# EAGLE board 13867-Haptic_Motor_Driver_DRV2605L_v20-panel (EAGLE 7.5.0), part 1 of 4
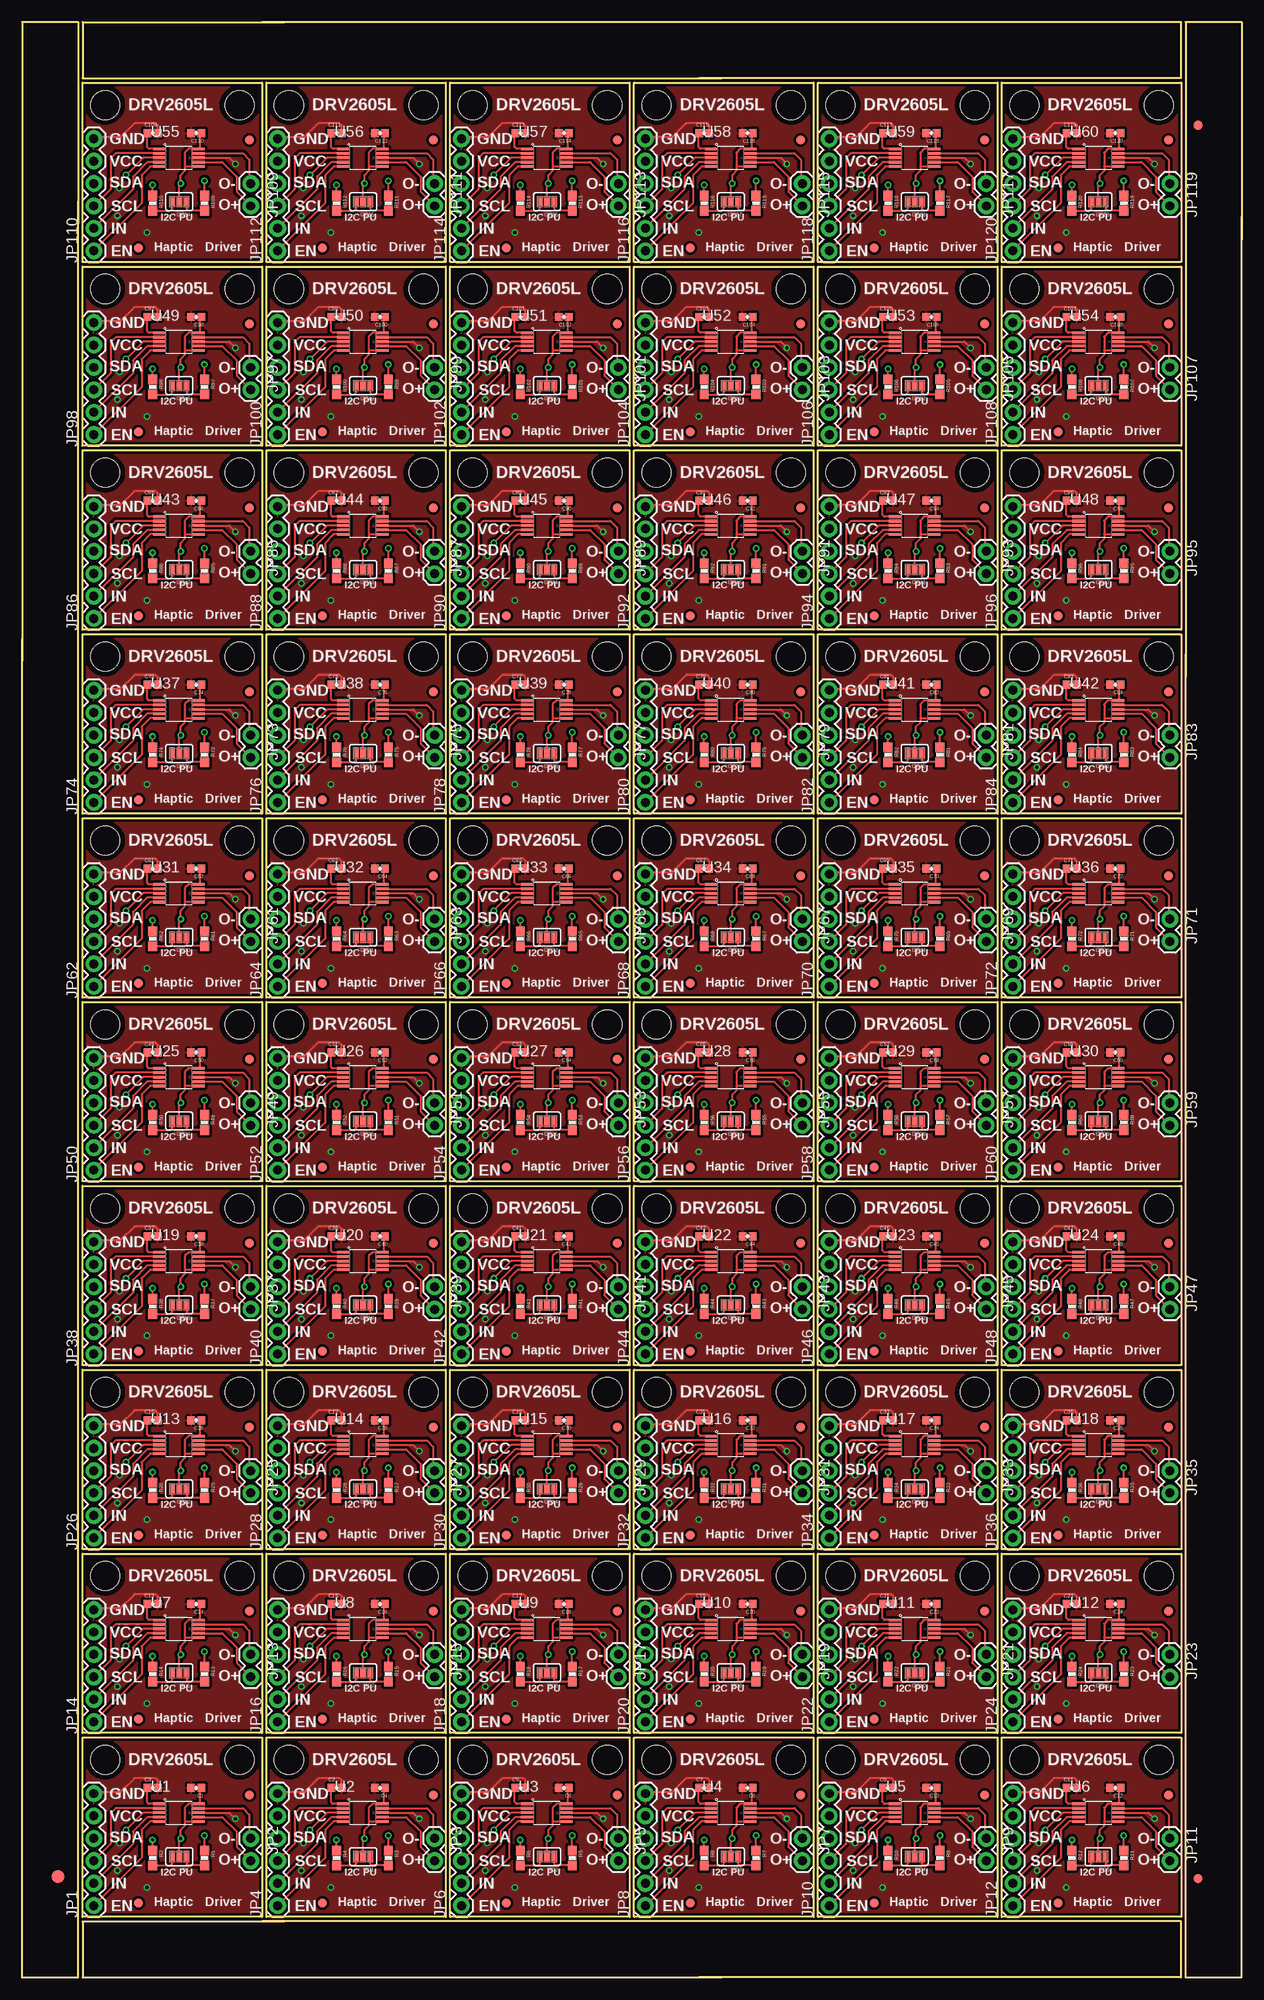
[diagram p0: board, top side]
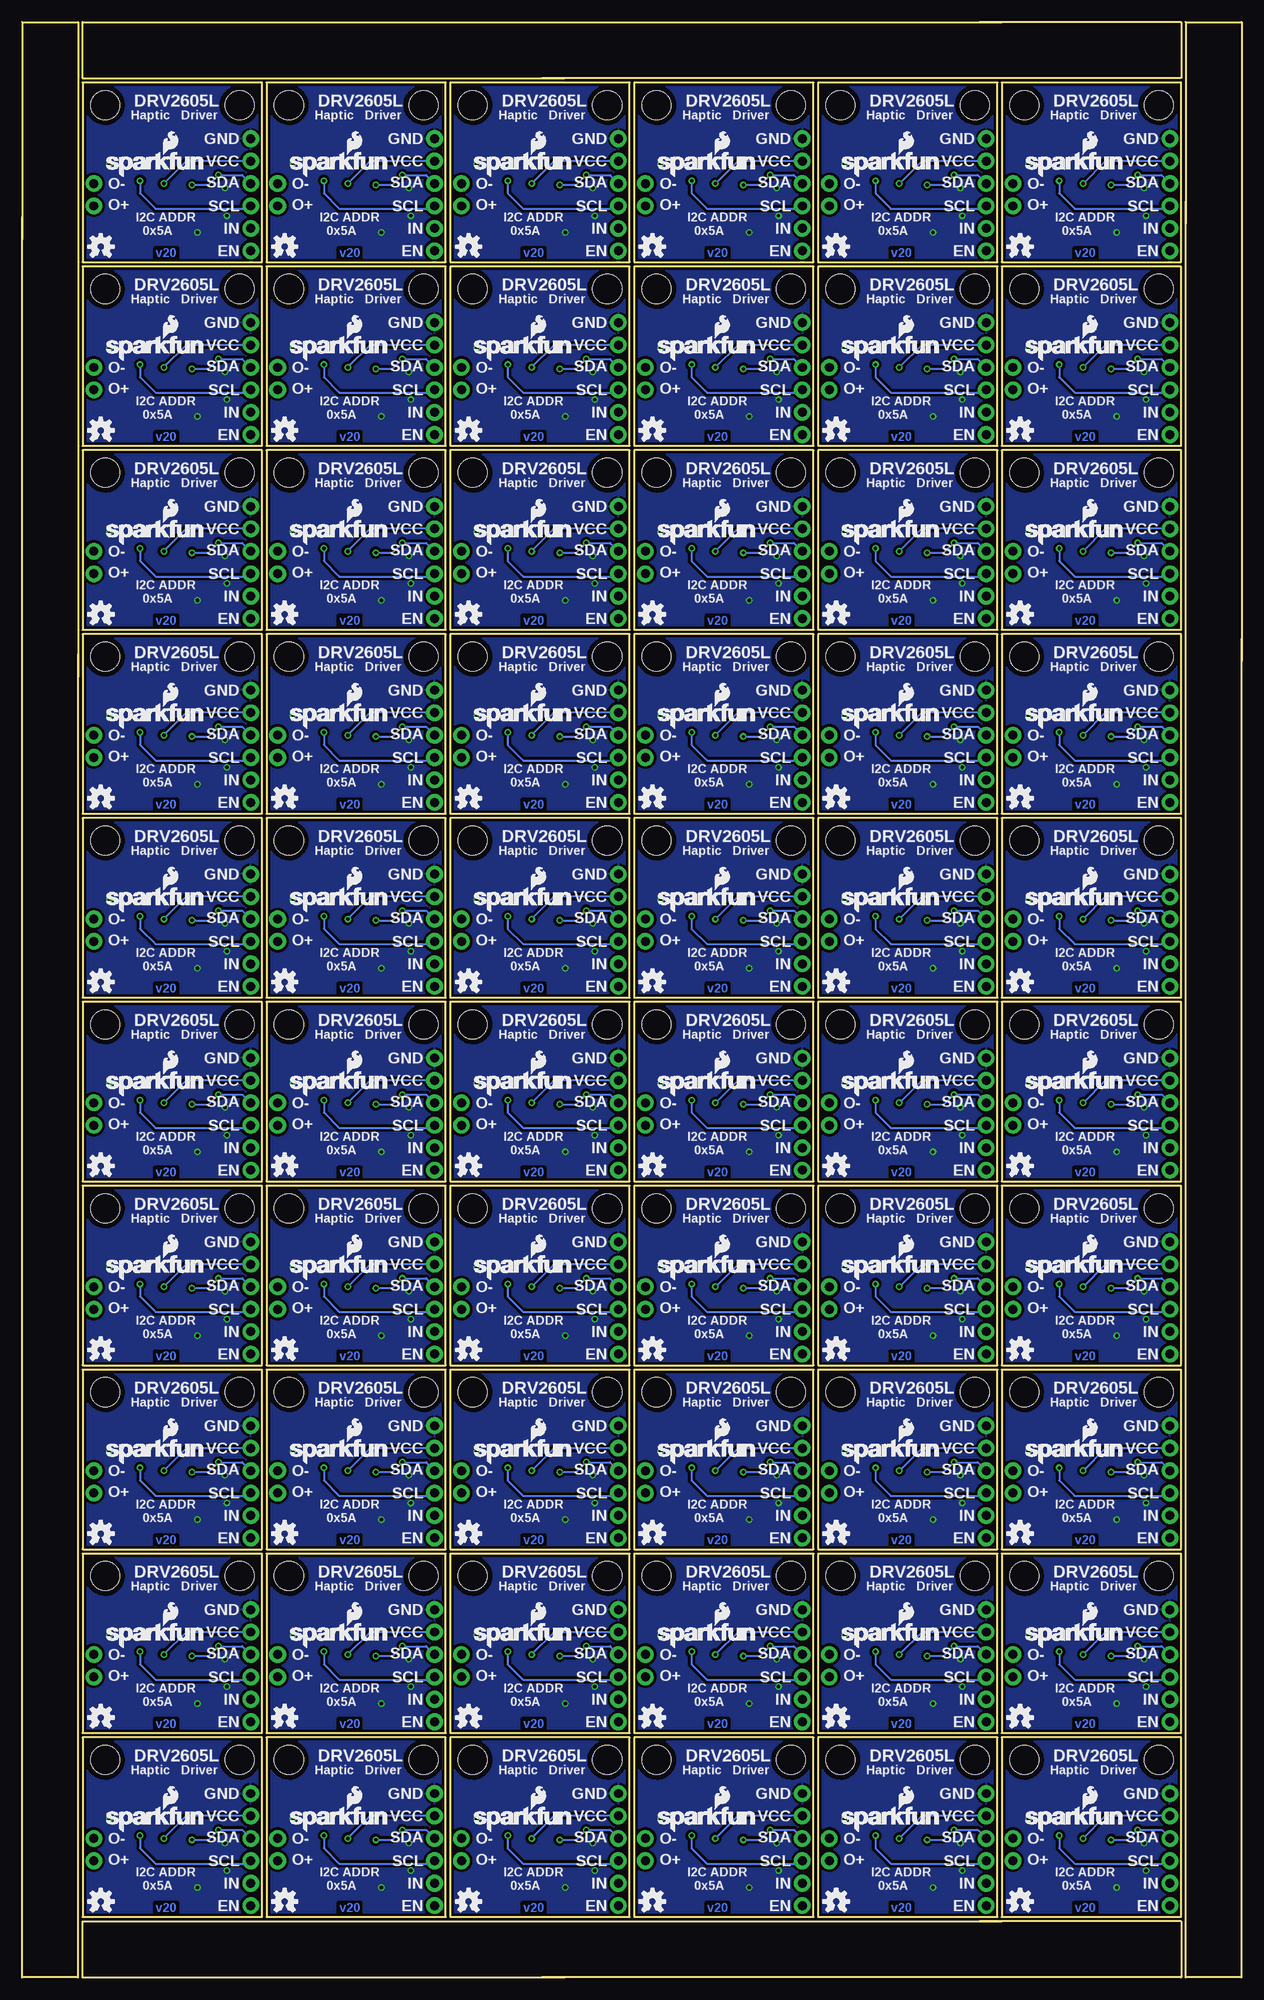
[diagram p1: board, bottom side, seen from below]

Size 138.18 x 221.49 mm. Coordinates in mm from the lower left corner, seen from the top.
Outline: 264 segments
Copper layers (1*16): Top 0.035mm / dielectric 1.5mm / Bottom 0.035mm
Design rules "SparkFun-2-layer-TIGHT": minimum track width 7mil, minimum drill 15mil, track to track 7mil, track to pad 7mil, pad to pad 7mil, via to via 7mil, smd to smd 7mil, copper to edge 7mil, drill to drill 7mil, minimum pad ring 7mil, minimum via ring 7mil, stop-mask expansion 4mil, vias tented up to drill 25mil, thermal gap 10mil
Net classes: 1 power: width 0.102 mm

## Footprints (pad centres in the part's own frame; a part is rotated, then mirrored left to right if it is on the bottom)
0402-CAP = smd 0.85 x 0.9: 1 -0.58,0; 2 0.58,0
FIDUCIAL-1.5X3 = smd 1.5 x 1.5: 1 0,0
FIDUCIAL-1X2 = smd 1 x 1: 1 0,0
PAD-JUMPER-3-NC_BY_PASTE_YES_SILK_FULL_BOX = smd 0.635 x 1.27: 1 -0.813,0; 2 0,0; 3 0.813,0
1X06 = drill 1.016 pad 1.88: 1 0,0; 2 2.54,0; 3 5.08,0; 4 7.62,0; 5 10.16,0; 6 12.7,0
1X02 = drill 1.016 pad 1.88: 1 0,0; 2 2.54,0
0603-RES = smd 1.1 x 1: 1 -0.85,0; 2 0.85,0
STAND-OFF = hole 3.302: 0,0
VSSOP-10 = smd 1.45 x 0.3: P$1 -1.905,1.06; P$2 -1.905,0.56; P$3 -1.905,0.06; P$4 -1.905,-0.44; P$5 -1.905,-0.94; P$6 2.495,-0.94; P$7 2.495,-0.44; P$8 2.495,0.06; P$9 2.495,0.56; P$10 2.495,1.06

## Placement (x,y rotation side)
C1  1.0uF  [0402-CAP]  19.72,21.46 180 top
C2  1.0uF  [0402-CAP]  35.62,21.46 0 top
C3  1.0uF  [0402-CAP]  14.8,21.46 0 top
C4  1.0uF  [0402-CAP]  40.54,21.46 180 top
C5  1.0uF  [0402-CAP]  56.45,21.46 0 top
C6  1.0uF  [0402-CAP]  61.37,21.46 180 top
C7  1.0uF  [0402-CAP]  77.28,21.46 0 top
C8  1.0uF  [0402-CAP]  82.2,21.46 180 top
C9  1.0uF  [0402-CAP]  98.11,21.46 0 top
C10  1.0uF  [0402-CAP]  103.03,21.46 180 top
C11  1.0uF  [0402-CAP]  118.94,21.46 0 top
C12  1.0uF  [0402-CAP]  123.86,21.46 180 top
C13  1.0uF  [0402-CAP]  14.8,42.29 0 top
C14  1.0uF  [0402-CAP]  19.72,42.29 180 top
C15  1.0uF  [0402-CAP]  35.62,42.29 0 top
C16  1.0uF  [0402-CAP]  40.54,42.29 180 top
C17  1.0uF  [0402-CAP]  56.45,42.29 0 top
C18  1.0uF  [0402-CAP]  61.37,42.29 180 top
C19  1.0uF  [0402-CAP]  77.28,42.29 0 top
C20  1.0uF  [0402-CAP]  82.2,42.29 180 top
C21  1.0uF  [0402-CAP]  98.11,42.29 0 top
C22  1.0uF  [0402-CAP]  103.03,42.29 180 top
C23  1.0uF  [0402-CAP]  118.94,42.29 0 top
C24  1.0uF  [0402-CAP]  123.86,42.29 180 top
C25  1.0uF  [0402-CAP]  14.8,63.12 0 top
C26  1.0uF  [0402-CAP]  19.72,63.12 180 top
C27  1.0uF  [0402-CAP]  35.62,63.12 0 top
C28  1.0uF  [0402-CAP]  40.54,63.12 180 top
C29  1.0uF  [0402-CAP]  56.45,63.12 0 top
C30  1.0uF  [0402-CAP]  61.37,63.12 180 top
C31  1.0uF  [0402-CAP]  77.28,63.12 0 top
C32  1.0uF  [0402-CAP]  82.2,63.12 180 top
C33  1.0uF  [0402-CAP]  98.11,63.12 0 top
C34  1.0uF  [0402-CAP]  103.03,63.12 180 top
C35  1.0uF  [0402-CAP]  118.94,63.12 0 top
C36  1.0uF  [0402-CAP]  123.86,63.12 180 top
C37  1.0uF  [0402-CAP]  14.8,83.95 0 top
C38  1.0uF  [0402-CAP]  19.72,83.95 180 top
C39  1.0uF  [0402-CAP]  35.62,83.95 0 top
C40  1.0uF  [0402-CAP]  40.54,83.95 180 top
C41  1.0uF  [0402-CAP]  56.45,83.95 0 top
C42  1.0uF  [0402-CAP]  61.37,83.95 180 top
C43  1.0uF  [0402-CAP]  77.28,83.95 0 top
C44  1.0uF  [0402-CAP]  82.2,83.95 180 top
C45  1.0uF  [0402-CAP]  98.11,83.95 0 top
C46  1.0uF  [0402-CAP]  103.03,83.95 180 top
C47  1.0uF  [0402-CAP]  118.94,83.95 0 top
C48  1.0uF  [0402-CAP]  123.86,83.95 180 top
C49  1.0uF  [0402-CAP]  14.8,104.78 0 top
C50  1.0uF  [0402-CAP]  19.72,104.78 180 top
C51  1.0uF  [0402-CAP]  35.62,104.78 0 top
C52  1.0uF  [0402-CAP]  40.54,104.78 180 top
C53  1.0uF  [0402-CAP]  56.45,104.78 0 top
C54  1.0uF  [0402-CAP]  61.37,104.78 180 top
C55  1.0uF  [0402-CAP]  77.28,104.78 0 top
C56  1.0uF  [0402-CAP]  82.2,104.78 180 top
C57  1.0uF  [0402-CAP]  98.11,104.78 0 top
C58  1.0uF  [0402-CAP]  103.03,104.78 180 top
C59  1.0uF  [0402-CAP]  118.94,104.78 0 top
C60  1.0uF  [0402-CAP]  123.86,104.78 180 top
C61  1.0uF  [0402-CAP]  14.8,125.6 0 top
C62  1.0uF  [0402-CAP]  19.72,125.6 180 top
C63  1.0uF  [0402-CAP]  35.62,125.6 0 top
C64  1.0uF  [0402-CAP]  40.54,125.6 180 top
C65  1.0uF  [0402-CAP]  56.45,125.6 0 top
C66  1.0uF  [0402-CAP]  61.37,125.6 180 top
C67  1.0uF  [0402-CAP]  77.28,125.6 0 top
C68  1.0uF  [0402-CAP]  82.2,125.6 180 top
C69  1.0uF  [0402-CAP]  98.11,125.6 0 top
C70  1.0uF  [0402-CAP]  103.03,125.6 180 top
C71  1.0uF  [0402-CAP]  118.94,125.6 0 top
C72  1.0uF  [0402-CAP]  123.86,125.6 180 top
C73  1.0uF  [0402-CAP]  14.8,146.43 0 top
C74  1.0uF  [0402-CAP]  19.72,146.43 180 top
C75  1.0uF  [0402-CAP]  35.62,146.43 0 top
C76  1.0uF  [0402-CAP]  40.54,146.43 180 top
C77  1.0uF  [0402-CAP]  56.45,146.43 0 top
C78  1.0uF  [0402-CAP]  61.37,146.43 180 top
C79  1.0uF  [0402-CAP]  77.28,146.43 0 top
C80  1.0uF  [0402-CAP]  82.2,146.43 180 top
C81  1.0uF  [0402-CAP]  98.11,146.43 0 top
C82  1.0uF  [0402-CAP]  103.03,146.43 180 top
C83  1.0uF  [0402-CAP]  118.94,146.43 0 top
C84  1.0uF  [0402-CAP]  123.86,146.43 180 top
C85  1.0uF  [0402-CAP]  14.8,167.26 0 top
C86  1.0uF  [0402-CAP]  19.72,167.26 180 top
C87  1.0uF  [0402-CAP]  35.62,167.26 0 top
C88  1.0uF  [0402-CAP]  40.54,167.26 180 top
C89  1.0uF  [0402-CAP]  56.45,167.26 0 top
C90  1.0uF  [0402-CAP]  61.37,167.26 180 top
C91  1.0uF  [0402-CAP]  77.28,167.26 0 top
C92  1.0uF  [0402-CAP]  82.2,167.26 180 top
C93  1.0uF  [0402-CAP]  98.11,167.26 0 top
C94  1.0uF  [0402-CAP]  103.03,167.26 180 top
C95  1.0uF  [0402-CAP]  118.94,167.26 0 top
C96  1.0uF  [0402-CAP]  123.86,167.26 180 top
C97  1.0uF  [0402-CAP]  14.8,188.09 0 top
C98  1.0uF  [0402-CAP]  19.72,188.09 180 top
C99  1.0uF  [0402-CAP]  35.62,188.09 0 top
C100  1.0uF  [0402-CAP]  40.54,188.09 180 top
C101  1.0uF  [0402-CAP]  56.45,188.09 0 top
C102  1.0uF  [0402-CAP]  61.37,188.09 180 top
C103  1.0uF  [0402-CAP]  77.28,188.09 0 top
C104  1.0uF  [0402-CAP]  82.2,188.09 180 top
C105  1.0uF  [0402-CAP]  98.11,188.09 0 top
C106  1.0uF  [0402-CAP]  103.03,188.09 180 top
C107  1.0uF  [0402-CAP]  118.94,188.09 0 top
C108  1.0uF  [0402-CAP]  123.86,188.09 180 top
C109  1.0uF  [0402-CAP]  14.8,208.91 0 top
C110  1.0uF  [0402-CAP]  19.72,208.91 180 top
C111  1.0uF  [0402-CAP]  35.62,208.91 0 top
C112  1.0uF  [0402-CAP]  40.54,208.91 180 top
C113  1.0uF  [0402-CAP]  56.45,208.91 0 top
C114  1.0uF  [0402-CAP]  61.37,208.91 180 top
C115  1.0uF  [0402-CAP]  77.28,208.91 0 top
C116  1.0uF  [0402-CAP]  82.2,208.91 180 top
C117  1.0uF  [0402-CAP]  98.11,208.91 0 top
C118  1.0uF  [0402-CAP]  103.03,208.91 180 top
C119  1.0uF  [0402-CAP]  118.94,208.91 0 top
C120  1.0uF  [0402-CAP]  123.86,208.91 180 top
E$1  [FIDUCIAL-1.5X3]  4.06,11.43 0 top
E$5  [FIDUCIAL-1X2]  133.22,209.8 180 top
E$6  [FIDUCIAL-1X2]  133.22,11.18 0 top
FID1  FIDUCIAL1X2  [FIDUCIAL-1X2]  13.21,8.45 0 top
FID2  FIDUCIAL1X2  [FIDUCIAL-1X2]  25.75,20.67 0 top
FID3  FIDUCIAL1X2  [FIDUCIAL-1X2]  34.04,8.45 0 top
FID4  FIDUCIAL1X2  [FIDUCIAL-1X2]  46.58,20.67 0 top
FID5  FIDUCIAL1X2  [FIDUCIAL-1X2]  54.86,8.45 0 top
FID6  FIDUCIAL1X2  [FIDUCIAL-1X2]  67.41,20.67 0 top
FID7  FIDUCIAL1X2  [FIDUCIAL-1X2]  75.69,8.45 0 top
FID8  FIDUCIAL1X2  [FIDUCIAL-1X2]  88.23,20.67 0 top
FID9  FIDUCIAL1X2  [FIDUCIAL-1X2]  96.52,8.45 0 top
FID10  FIDUCIAL1X2  [FIDUCIAL-1X2]  109.06,20.67 0 top
FID11  FIDUCIAL1X2  [FIDUCIAL-1X2]  117.35,8.45 0 top
FID12  FIDUCIAL1X2  [FIDUCIAL-1X2]  129.89,20.67 0 top
FID13  FIDUCIAL1X2  [FIDUCIAL-1X2]  13.21,29.27 0 top
FID14  FIDUCIAL1X2  [FIDUCIAL-1X2]  25.75,41.5 0 top
FID15  FIDUCIAL1X2  [FIDUCIAL-1X2]  34.04,29.27 0 top
FID16  FIDUCIAL1X2  [FIDUCIAL-1X2]  46.58,41.5 0 top
FID17  FIDUCIAL1X2  [FIDUCIAL-1X2]  54.86,29.27 0 top
FID18  FIDUCIAL1X2  [FIDUCIAL-1X2]  67.41,41.5 0 top
FID19  FIDUCIAL1X2  [FIDUCIAL-1X2]  75.69,29.27 0 top
FID20  FIDUCIAL1X2  [FIDUCIAL-1X2]  88.23,41.5 0 top
FID21  FIDUCIAL1X2  [FIDUCIAL-1X2]  96.52,29.27 0 top
FID22  FIDUCIAL1X2  [FIDUCIAL-1X2]  109.06,41.5 0 top
FID23  FIDUCIAL1X2  [FIDUCIAL-1X2]  117.35,29.27 0 top
FID24  FIDUCIAL1X2  [FIDUCIAL-1X2]  129.89,41.5 0 top
FID25  FIDUCIAL1X2  [FIDUCIAL-1X2]  13.21,50.1 0 top
FID26  FIDUCIAL1X2  [FIDUCIAL-1X2]  25.75,62.33 0 top
FID27  FIDUCIAL1X2  [FIDUCIAL-1X2]  34.04,50.1 0 top
FID28  FIDUCIAL1X2  [FIDUCIAL-1X2]  46.58,62.33 0 top
FID29  FIDUCIAL1X2  [FIDUCIAL-1X2]  54.86,50.1 0 top
FID30  FIDUCIAL1X2  [FIDUCIAL-1X2]  67.41,62.33 0 top
FID31  FIDUCIAL1X2  [FIDUCIAL-1X2]  75.69,50.1 0 top
FID32  FIDUCIAL1X2  [FIDUCIAL-1X2]  88.23,62.33 0 top
FID33  FIDUCIAL1X2  [FIDUCIAL-1X2]  96.52,50.1 0 top
FID34  FIDUCIAL1X2  [FIDUCIAL-1X2]  109.06,62.33 0 top
FID35  FIDUCIAL1X2  [FIDUCIAL-1X2]  117.35,50.1 0 top
FID36  FIDUCIAL1X2  [FIDUCIAL-1X2]  129.89,62.33 0 top
FID37  FIDUCIAL1X2  [FIDUCIAL-1X2]  13.21,70.93 0 top
FID38  FIDUCIAL1X2  [FIDUCIAL-1X2]  25.75,83.15 0 top
FID39  FIDUCIAL1X2  [FIDUCIAL-1X2]  34.04,70.93 0 top
FID40  FIDUCIAL1X2  [FIDUCIAL-1X2]  46.58,83.15 0 top
FID41  FIDUCIAL1X2  [FIDUCIAL-1X2]  54.86,70.93 0 top
FID42  FIDUCIAL1X2  [FIDUCIAL-1X2]  67.41,83.15 0 top
FID43  FIDUCIAL1X2  [FIDUCIAL-1X2]  75.69,70.93 0 top
FID44  FIDUCIAL1X2  [FIDUCIAL-1X2]  88.23,83.15 0 top
FID45  FIDUCIAL1X2  [FIDUCIAL-1X2]  96.52,70.93 0 top
FID46  FIDUCIAL1X2  [FIDUCIAL-1X2]  109.06,83.15 0 top
FID47  FIDUCIAL1X2  [FIDUCIAL-1X2]  117.35,70.93 0 top
FID48  FIDUCIAL1X2  [FIDUCIAL-1X2]  129.89,83.15 0 top
FID49  FIDUCIAL1X2  [FIDUCIAL-1X2]  13.21,91.76 0 top
FID50  FIDUCIAL1X2  [FIDUCIAL-1X2]  25.75,103.98 0 top
FID51  FIDUCIAL1X2  [FIDUCIAL-1X2]  34.04,91.76 0 top
FID52  FIDUCIAL1X2  [FIDUCIAL-1X2]  46.58,103.98 0 top
FID53  FIDUCIAL1X2  [FIDUCIAL-1X2]  54.86,91.76 0 top
FID54  FIDUCIAL1X2  [FIDUCIAL-1X2]  67.41,103.98 0 top
FID55  FIDUCIAL1X2  [FIDUCIAL-1X2]  75.69,91.76 0 top
FID56  FIDUCIAL1X2  [FIDUCIAL-1X2]  88.23,103.98 0 top
FID57  FIDUCIAL1X2  [FIDUCIAL-1X2]  96.52,91.76 0 top
FID58  FIDUCIAL1X2  [FIDUCIAL-1X2]  109.06,103.98 0 top
FID59  FIDUCIAL1X2  [FIDUCIAL-1X2]  117.35,91.76 0 top
FID60  FIDUCIAL1X2  [FIDUCIAL-1X2]  129.89,103.98 0 top
FID61  FIDUCIAL1X2  [FIDUCIAL-1X2]  13.21,112.59 0 top
FID62  FIDUCIAL1X2  [FIDUCIAL-1X2]  25.75,124.81 0 top
FID63  FIDUCIAL1X2  [FIDUCIAL-1X2]  34.04,112.59 0 top
FID64  FIDUCIAL1X2  [FIDUCIAL-1X2]  46.58,124.81 0 top
FID65  FIDUCIAL1X2  [FIDUCIAL-1X2]  54.86,112.59 0 top
FID66  FIDUCIAL1X2  [FIDUCIAL-1X2]  67.41,124.81 0 top
FID67  FIDUCIAL1X2  [FIDUCIAL-1X2]  75.69,112.59 0 top
FID68  FIDUCIAL1X2  [FIDUCIAL-1X2]  88.23,124.81 0 top
FID69  FIDUCIAL1X2  [FIDUCIAL-1X2]  96.52,112.59 0 top
FID70  FIDUCIAL1X2  [FIDUCIAL-1X2]  109.06,124.81 0 top
FID71  FIDUCIAL1X2  [FIDUCIAL-1X2]  117.35,112.59 0 top
FID72  FIDUCIAL1X2  [FIDUCIAL-1X2]  129.89,124.81 0 top
FID73  FIDUCIAL1X2  [FIDUCIAL-1X2]  13.21,133.41 0 top
FID74  FIDUCIAL1X2  [FIDUCIAL-1X2]  25.75,145.64 0 top
FID75  FIDUCIAL1X2  [FIDUCIAL-1X2]  34.04,133.41 0 top
FID76  FIDUCIAL1X2  [FIDUCIAL-1X2]  46.58,145.64 0 top
FID77  FIDUCIAL1X2  [FIDUCIAL-1X2]  54.86,133.41 0 top
FID78  FIDUCIAL1X2  [FIDUCIAL-1X2]  67.41,145.64 0 top
FID79  FIDUCIAL1X2  [FIDUCIAL-1X2]  75.69,133.41 0 top
FID80  FIDUCIAL1X2  [FIDUCIAL-1X2]  88.23,145.64 0 top
FID81  FIDUCIAL1X2  [FIDUCIAL-1X2]  96.52,133.41 0 top
FID82  FIDUCIAL1X2  [FIDUCIAL-1X2]  109.06,145.64 0 top
FID83  FIDUCIAL1X2  [FIDUCIAL-1X2]  117.35,133.41 0 top
FID84  FIDUCIAL1X2  [FIDUCIAL-1X2]  129.89,145.64 0 top
FID85  FIDUCIAL1X2  [FIDUCIAL-1X2]  13.21,154.24 0 top
FID86  FIDUCIAL1X2  [FIDUCIAL-1X2]  25.75,166.47 0 top
FID87  FIDUCIAL1X2  [FIDUCIAL-1X2]  34.04,154.24 0 top
FID88  FIDUCIAL1X2  [FIDUCIAL-1X2]  46.58,166.47 0 top
FID89  FIDUCIAL1X2  [FIDUCIAL-1X2]  54.86,154.24 0 top
FID90  FIDUCIAL1X2  [FIDUCIAL-1X2]  67.41,166.47 0 top
FID91  FIDUCIAL1X2  [FIDUCIAL-1X2]  75.69,154.24 0 top
FID92  FIDUCIAL1X2  [FIDUCIAL-1X2]  88.23,166.47 0 top
FID93  FIDUCIAL1X2  [FIDUCIAL-1X2]  96.52,154.24 0 top
FID94  FIDUCIAL1X2  [FIDUCIAL-1X2]  109.06,166.47 0 top
FID95  FIDUCIAL1X2  [FIDUCIAL-1X2]  117.35,154.24 0 top
FID96  FIDUCIAL1X2  [FIDUCIAL-1X2]  129.89,166.47 0 top
FID97  FIDUCIAL1X2  [FIDUCIAL-1X2]  13.21,175.07 0 top
FID98  FIDUCIAL1X2  [FIDUCIAL-1X2]  25.75,187.29 0 top
FID99  FIDUCIAL1X2  [FIDUCIAL-1X2]  34.04,175.07 0 top
FID100  FIDUCIAL1X2  [FIDUCIAL-1X2]  46.58,187.29 0 top
FID101  FIDUCIAL1X2  [FIDUCIAL-1X2]  54.86,175.07 0 top
FID102  FIDUCIAL1X2  [FIDUCIAL-1X2]  67.41,187.29 0 top
FID103  FIDUCIAL1X2  [FIDUCIAL-1X2]  75.69,175.07 0 top
FID104  FIDUCIAL1X2  [FIDUCIAL-1X2]  88.23,187.29 0 top
FID105  FIDUCIAL1X2  [FIDUCIAL-1X2]  96.52,175.07 0 top
FID106  FIDUCIAL1X2  [FIDUCIAL-1X2]  109.06,187.29 0 top
FID107  FIDUCIAL1X2  [FIDUCIAL-1X2]  117.35,175.07 0 top
FID108  FIDUCIAL1X2  [FIDUCIAL-1X2]  129.89,187.29 0 top
FID109  FIDUCIAL1X2  [FIDUCIAL-1X2]  13.21,195.9 0 top
FID110  FIDUCIAL1X2  [FIDUCIAL-1X2]  25.75,208.12 0 top
FID111  FIDUCIAL1X2  [FIDUCIAL-1X2]  34.04,195.9 0 top
FID112  FIDUCIAL1X2  [FIDUCIAL-1X2]  46.58,208.12 0 top
FID113  FIDUCIAL1X2  [FIDUCIAL-1X2]  54.86,195.9 0 top
FID114  FIDUCIAL1X2  [FIDUCIAL-1X2]  67.41,208.12 0 top
FID115  FIDUCIAL1X2  [FIDUCIAL-1X2]  75.69,195.9 0 top
FID116  FIDUCIAL1X2  [FIDUCIAL-1X2]  88.23,208.12 0 top
FID117  FIDUCIAL1X2  [FIDUCIAL-1X2]  96.52,195.9 0 top
FID118  FIDUCIAL1X2  [FIDUCIAL-1X2]  109.06,208.12 0 top
FID119  FIDUCIAL1X2  [FIDUCIAL-1X2]  117.35,195.9 0 top
FID120  FIDUCIAL1X2  [FIDUCIAL-1X2]  129.89,208.12 0 top
I2C  JUMPER-PAD-3-NC_BY_PASTE  [PAD-JUMPER-3-NC_BY_PASTE_YES_SILK_FULL_BOX]  17.81,13.68 180 top
I2C1  JUMPER-PAD-3-NC_BY_PASTE  [PAD-JUMPER-3-NC_BY_PASTE_YES_SILK_FULL_BOX]  38.64,13.68 180 top
I2C2  JUMPER-PAD-3-NC_BY_PASTE  [PAD-JUMPER-3-NC_BY_PASTE_YES_SILK_FULL_BOX]  59.47,13.68 180 top
I2C3  JUMPER-PAD-3-NC_BY_PASTE  [PAD-JUMPER-3-NC_BY_PASTE_YES_SILK_FULL_BOX]  80.3,13.68 180 top
I2C4  JUMPER-PAD-3-NC_BY_PASTE  [PAD-JUMPER-3-NC_BY_PASTE_YES_SILK_FULL_BOX]  101.12,13.68 180 top
I2C5  JUMPER-PAD-3-NC_BY_PASTE  [PAD-JUMPER-3-NC_BY_PASTE_YES_SILK_FULL_BOX]  121.95,13.68 180 top
I2C6  JUMPER-PAD-3-NC_BY_PASTE  [PAD-JUMPER-3-NC_BY_PASTE_YES_SILK_FULL_BOX]  17.81,34.51 180 top
I2C7  JUMPER-PAD-3-NC_BY_PASTE  [PAD-JUMPER-3-NC_BY_PASTE_YES_SILK_FULL_BOX]  38.64,34.51 180 top
I2C8  JUMPER-PAD-3-NC_BY_PASTE  [PAD-JUMPER-3-NC_BY_PASTE_YES_SILK_FULL_BOX]  59.47,34.51 180 top
I2C9  JUMPER-PAD-3-NC_BY_PASTE  [PAD-JUMPER-3-NC_BY_PASTE_YES_SILK_FULL_BOX]  80.3,34.51 180 top
I2C10  JUMPER-PAD-3-NC_BY_PASTE  [PAD-JUMPER-3-NC_BY_PASTE_YES_SILK_FULL_BOX]  101.12,34.51 180 top
I2C11  JUMPER-PAD-3-NC_BY_PASTE  [PAD-JUMPER-3-NC_BY_PASTE_YES_SILK_FULL_BOX]  121.95,34.51 180 top
I2C12  JUMPER-PAD-3-NC_BY_PASTE  [PAD-JUMPER-3-NC_BY_PASTE_YES_SILK_FULL_BOX]  17.81,55.34 180 top
I2C13  JUMPER-PAD-3-NC_BY_PASTE  [PAD-JUMPER-3-NC_BY_PASTE_YES_SILK_FULL_BOX]  38.64,55.34 180 top
I2C14  JUMPER-PAD-3-NC_BY_PASTE  [PAD-JUMPER-3-NC_BY_PASTE_YES_SILK_FULL_BOX]  59.47,55.34 180 top
I2C15  JUMPER-PAD-3-NC_BY_PASTE  [PAD-JUMPER-3-NC_BY_PASTE_YES_SILK_FULL_BOX]  80.3,55.34 180 top
I2C16  JUMPER-PAD-3-NC_BY_PASTE  [PAD-JUMPER-3-NC_BY_PASTE_YES_SILK_FULL_BOX]  101.12,55.34 180 top
I2C17  JUMPER-PAD-3-NC_BY_PASTE  [PAD-JUMPER-3-NC_BY_PASTE_YES_SILK_FULL_BOX]  121.95,55.34 180 top
I2C18  JUMPER-PAD-3-NC_BY_PASTE  [PAD-JUMPER-3-NC_BY_PASTE_YES_SILK_FULL_BOX]  17.81,76.17 180 top
I2C19  JUMPER-PAD-3-NC_BY_PASTE  [PAD-JUMPER-3-NC_BY_PASTE_YES_SILK_FULL_BOX]  38.64,76.17 180 top
I2C20  JUMPER-PAD-3-NC_BY_PASTE  [PAD-JUMPER-3-NC_BY_PASTE_YES_SILK_FULL_BOX]  59.47,76.17 180 top
I2C21  JUMPER-PAD-3-NC_BY_PASTE  [PAD-JUMPER-3-NC_BY_PASTE_YES_SILK_FULL_BOX]  80.3,76.17 180 top
I2C22  JUMPER-PAD-3-NC_BY_PASTE  [PAD-JUMPER-3-NC_BY_PASTE_YES_SILK_FULL_BOX]  101.12,76.17 180 top
I2C23  JUMPER-PAD-3-NC_BY_PASTE  [PAD-JUMPER-3-NC_BY_PASTE_YES_SILK_FULL_BOX]  121.95,76.17 180 top
I2C24  JUMPER-PAD-3-NC_BY_PASTE  [PAD-JUMPER-3-NC_BY_PASTE_YES_SILK_FULL_BOX]  17.81,97 180 top
I2C25  JUMPER-PAD-3-NC_BY_PASTE  [PAD-JUMPER-3-NC_BY_PASTE_YES_SILK_FULL_BOX]  38.64,97 180 top
I2C26  JUMPER-PAD-3-NC_BY_PASTE  [PAD-JUMPER-3-NC_BY_PASTE_YES_SILK_FULL_BOX]  59.47,97 180 top
I2C27  JUMPER-PAD-3-NC_BY_PASTE  [PAD-JUMPER-3-NC_BY_PASTE_YES_SILK_FULL_BOX]  80.3,97 180 top
I2C28  JUMPER-PAD-3-NC_BY_PASTE  [PAD-JUMPER-3-NC_BY_PASTE_YES_SILK_FULL_BOX]  101.12,97 180 top
I2C29  JUMPER-PAD-3-NC_BY_PASTE  [PAD-JUMPER-3-NC_BY_PASTE_YES_SILK_FULL_BOX]  121.95,97 180 top
I2C30  JUMPER-PAD-3-NC_BY_PASTE  [PAD-JUMPER-3-NC_BY_PASTE_YES_SILK_FULL_BOX]  17.81,117.82 180 top
I2C31  JUMPER-PAD-3-NC_BY_PASTE  [PAD-JUMPER-3-NC_BY_PASTE_YES_SILK_FULL_BOX]  38.64,117.82 180 top
I2C32  JUMPER-PAD-3-NC_BY_PASTE  [PAD-JUMPER-3-NC_BY_PASTE_YES_SILK_FULL_BOX]  59.47,117.82 180 top
I2C33  JUMPER-PAD-3-NC_BY_PASTE  [PAD-JUMPER-3-NC_BY_PASTE_YES_SILK_FULL_BOX]  80.3,117.82 180 top
I2C34  JUMPER-PAD-3-NC_BY_PASTE  [PAD-JUMPER-3-NC_BY_PASTE_YES_SILK_FULL_BOX]  101.12,117.82 180 top
I2C35  JUMPER-PAD-3-NC_BY_PASTE  [PAD-JUMPER-3-NC_BY_PASTE_YES_SILK_FULL_BOX]  121.95,117.82 180 top
I2C36  JUMPER-PAD-3-NC_BY_PASTE  [PAD-JUMPER-3-NC_BY_PASTE_YES_SILK_FULL_BOX]  17.81,138.65 180 top
I2C37  JUMPER-PAD-3-NC_BY_PASTE  [PAD-JUMPER-3-NC_BY_PASTE_YES_SILK_FULL_BOX]  38.64,138.65 180 top
I2C38  JUMPER-PAD-3-NC_BY_PASTE  [PAD-JUMPER-3-NC_BY_PASTE_YES_SILK_FULL_BOX]  59.47,138.65 180 top
I2C39  JUMPER-PAD-3-NC_BY_PASTE  [PAD-JUMPER-3-NC_BY_PASTE_YES_SILK_FULL_BOX]  80.3,138.65 180 top
I2C40  JUMPER-PAD-3-NC_BY_PASTE  [PAD-JUMPER-3-NC_BY_PASTE_YES_SILK_FULL_BOX]  101.12,138.65 180 top
I2C41  JUMPER-PAD-3-NC_BY_PASTE  [PAD-JUMPER-3-NC_BY_PASTE_YES_SILK_FULL_BOX]  121.95,138.65 180 top
I2C42  JUMPER-PAD-3-NC_BY_PASTE  [PAD-JUMPER-3-NC_BY_PASTE_YES_SILK_FULL_BOX]  17.81,159.48 180 top
I2C43  JUMPER-PAD-3-NC_BY_PASTE  [PAD-JUMPER-3-NC_BY_PASTE_YES_SILK_FULL_BOX]  38.64,159.48 180 top
I2C44  JUMPER-PAD-3-NC_BY_PASTE  [PAD-JUMPER-3-NC_BY_PASTE_YES_SILK_FULL_BOX]  59.47,159.48 180 top
I2C45  JUMPER-PAD-3-NC_BY_PASTE  [PAD-JUMPER-3-NC_BY_PASTE_YES_SILK_FULL_BOX]  80.3,159.48 180 top
I2C46  JUMPER-PAD-3-NC_BY_PASTE  [PAD-JUMPER-3-NC_BY_PASTE_YES_SILK_FULL_BOX]  101.12,159.48 180 top
I2C47  JUMPER-PAD-3-NC_BY_PASTE  [PAD-JUMPER-3-NC_BY_PASTE_YES_SILK_FULL_BOX]  121.95,159.48 180 top
I2C48  JUMPER-PAD-3-NC_BY_PASTE  [PAD-JUMPER-3-NC_BY_PASTE_YES_SILK_FULL_BOX]  17.81,180.31 180 top
I2C49  JUMPER-PAD-3-NC_BY_PASTE  [PAD-JUMPER-3-NC_BY_PASTE_YES_SILK_FULL_BOX]  38.64,180.31 180 top
I2C50  JUMPER-PAD-3-NC_BY_PASTE  [PAD-JUMPER-3-NC_BY_PASTE_YES_SILK_FULL_BOX]  59.47,180.31 180 top
I2C51  JUMPER-PAD-3-NC_BY_PASTE  [PAD-JUMPER-3-NC_BY_PASTE_YES_SILK_FULL_BOX]  80.3,180.31 180 top
I2C52  JUMPER-PAD-3-NC_BY_PASTE  [PAD-JUMPER-3-NC_BY_PASTE_YES_SILK_FULL_BOX]  101.12,180.31 180 top
I2C53  JUMPER-PAD-3-NC_BY_PASTE  [PAD-JUMPER-3-NC_BY_PASTE_YES_SILK_FULL_BOX]  121.95,180.31 180 top
I2C54  JUMPER-PAD-3-NC_BY_PASTE  [PAD-JUMPER-3-NC_BY_PASTE_YES_SILK_FULL_BOX]  17.81,201.14 180 top
I2C55  JUMPER-PAD-3-NC_BY_PASTE  [PAD-JUMPER-3-NC_BY_PASTE_YES_SILK_FULL_BOX]  38.64,201.14 180 top
I2C56  JUMPER-PAD-3-NC_BY_PASTE  [PAD-JUMPER-3-NC_BY_PASTE_YES_SILK_FULL_BOX]  59.47,201.14 180 top
I2C57  JUMPER-PAD-3-NC_BY_PASTE  [PAD-JUMPER-3-NC_BY_PASTE_YES_SILK_FULL_BOX]  80.3,201.14 180 top
I2C58  JUMPER-PAD-3-NC_BY_PASTE  [PAD-JUMPER-3-NC_BY_PASTE_YES_SILK_FULL_BOX]  101.12,201.14 180 top
I2C59  JUMPER-PAD-3-NC_BY_PASTE  [PAD-JUMPER-3-NC_BY_PASTE_YES_SILK_FULL_BOX]  121.95,201.14 180 top
JP1  [1X06]  8.13,8.13 90 top
JP2  [1X02]  25.91,15.75 270 top
JP3  [1X02]  46.74,15.75 270 top
JP4  [1X06]  28.96,8.13 90 top
JP5  [1X02]  67.56,15.75 270 top
JP6  [1X06]  49.78,8.13 90 top
JP7  [1X02]  88.39,15.75 270 top
JP8  [1X06]  70.61,8.13 90 top
JP9  [1X02]  109.22,15.75 270 top
JP10  [1X06]  91.44,8.13 90 top
JP11  [1X02]  130.05,15.75 270 top
JP12  [1X06]  112.27,8.13 90 top
JP13  [1X02]  25.91,36.58 270 top
JP14  [1X06]  8.13,28.96 90 top
JP15  [1X02]  46.74,36.58 270 top
JP16  [1X06]  28.96,28.96 90 top
JP17  [1X02]  67.56,36.58 270 top
JP18  [1X06]  49.78,28.96 90 top
JP19  [1X02]  88.39,36.58 270 top
JP20  [1X06]  70.61,28.96 90 top
JP21  [1X02]  109.22,36.58 270 top
JP22  [1X06]  91.44,28.96 90 top
JP23  [1X02]  130.05,36.58 270 top
JP24  [1X06]  112.27,28.96 90 top
JP25  [1X02]  25.91,57.4 270 top
JP26  [1X06]  8.13,49.78 90 top
JP27  [1X02]  46.74,57.4 270 top
JP28  [1X06]  28.96,49.78 90 top
JP29  [1X02]  67.56,57.4 270 top
JP30  [1X06]  49.78,49.78 90 top
JP31  [1X02]  88.39,57.4 270 top
JP32  [1X06]  70.61,49.78 90 top
JP33  [1X02]  109.22,57.4 270 top
JP34  [1X06]  91.44,49.78 90 top
JP35  [1X02]  130.05,57.4 270 top
JP36  [1X06]  112.27,49.78 90 top
JP37  [1X02]  25.91,78.23 270 top
JP38  [1X06]  8.13,70.61 90 top
JP39  [1X02]  46.74,78.23 270 top
JP40  [1X06]  28.96,70.61 90 top
JP41  [1X02]  67.56,78.23 270 top
JP42  [1X06]  49.78,70.61 90 top
JP43  [1X02]  88.39,78.23 270 top
JP44  [1X06]  70.61,70.61 90 top
JP45  [1X02]  109.22,78.23 270 top
JP46  [1X06]  91.44,70.61 90 top
JP47  [1X02]  130.05,78.23 270 top
JP48  [1X06]  112.27,70.61 90 top
JP49  [1X02]  25.91,99.06 270 top
JP50  [1X06]  8.13,91.44 90 top
JP51  [1X02]  46.74,99.06 270 top
JP52  [1X06]  28.96,91.44 90 top
JP53  [1X02]  67.56,99.06 270 top
JP54  [1X06]  49.78,91.44 90 top
JP55  [1X02]  88.39,99.06 270 top
JP56  [1X06]  70.61,91.44 90 top
JP57  [1X02]  109.22,99.06 270 top
JP58  [1X06]  91.44,91.44 90 top
JP59  [1X02]  130.05,99.06 270 top
JP60  [1X06]  112.27,91.44 90 top
JP61  [1X02]  25.91,119.89 270 top
JP62  [1X06]  8.13,112.27 90 top
JP63  [1X02]  46.74,119.89 270 top
JP64  [1X06]  28.96,112.27 90 top
JP65  [1X02]  67.56,119.89 270 top
JP66  [1X06]  49.78,112.27 90 top
JP67  [1X02]  88.39,119.89 270 top
JP68  [1X06]  70.61,112.27 90 top
JP69  [1X02]  109.22,119.89 270 top
JP70  [1X06]  91.44,112.27 90 top
JP71  [1X02]  130.05,119.89 270 top
JP72  [1X06]  112.27,112.27 90 top
JP73  [1X02]  25.91,140.72 270 top
JP74  [1X06]  8.13,133.1 90 top
JP75  [1X02]  46.74,140.72 270 top
JP76  [1X06]  28.96,133.1 90 top
JP77  [1X02]  67.56,140.72 270 top
JP78  [1X06]  49.78,133.1 90 top
JP79  [1X02]  88.39,140.72 270 top
JP80  [1X06]  70.61,133.1 90 top
JP81  [1X02]  109.22,140.72 270 top
JP82  [1X06]  91.44,133.1 90 top
JP83  [1X02]  130.05,140.72 270 top
JP84  [1X06]  112.27,133.1 90 top
JP85  [1X02]  25.91,161.54 270 top
JP86  [1X06]  8.13,153.92 90 top
JP87  [1X02]  46.74,161.54 270 top
JP88  [1X06]  28.96,153.92 90 top
JP89  [1X02]  67.56,161.54 270 top
JP90  [1X06]  49.78,153.92 90 top
JP91  [1X02]  88.39,161.54 270 top
JP92  [1X06]  70.61,153.92 90 top
JP93  [1X02]  109.22,161.54 270 top
JP94  [1X06]  91.44,153.92 90 top
JP95  [1X02]  130.05,161.54 270 top
JP96  [1X06]  112.27,153.92 90 top
JP97  [1X02]  25.91,182.37 270 top
JP98  [1X06]  8.13,174.75 90 top
JP99  [1X02]  46.74,182.37 270 top
JP100  [1X06]  28.96,174.75 90 top
JP101  [1X02]  67.56,182.37 270 top
JP102  [1X06]  49.78,174.75 90 top
JP103  [1X02]  88.39,182.37 270 top
JP104  [1X06]  70.61,174.75 90 top
JP105  [1X02]  109.22,182.37 270 top
JP106  [1X06]  91.44,174.75 90 top
JP107  [1X02]  130.05,182.37 270 top
JP108  [1X06]  112.27,174.75 90 top
JP109  [1X02]  25.91,203.2 270 top
JP110  [1X06]  8.13,195.58 90 top
JP111  [1X02]  46.74,203.2 270 top
JP112  [1X06]  28.96,195.58 90 top
JP113  [1X02]  67.56,203.2 270 top
JP114  [1X06]  49.78,195.58 90 top
JP115  [1X02]  88.39,203.2 270 top
JP116  [1X06]  70.61,195.58 90 top
JP117  [1X02]  109.22,203.2 270 top
JP118  [1X06]  91.44,195.58 90 top
JP119  [1X02]  130.05,203.2 270 top
JP120  [1X06]  112.27,195.58 90 top
LOGO1  OSHW-LOGOS  [OSHW-LOGO-S]  45.94,8.6 0 bottom
LOGO2  OSHW-LOGOS  [OSHW-LOGO-S]  25.11,8.6 0 bottom
LOGO3  SFE_LOGO_NAME_FLAME.1_INCH  [SFE_LOGO_NAME_FLAME_.1]  45.72,16.41 0 bottom
LOGO4  SFE_LOGO_NAME_FLAME.1_INCH  [SFE_LOGO_NAME_FLAME_.1]  24.89,16.41 0 bottom
LOGO5  OSHW-LOGOS  [OSHW-LOGO-S]  66.77,8.6 0 bottom
LOGO6  SFE_LOGO_NAME_FLAME.1_INCH  [SFE_LOGO_NAME_FLAME_.1]  66.55,16.41 0 bottom
LOGO7  OSHW-LOGOS  [OSHW-LOGO-S]  87.6,8.6 0 bottom
LOGO8  SFE_LOGO_NAME_FLAME.1_INCH  [SFE_LOGO_NAME_FLAME_.1]  87.38,16.41 0 bottom
LOGO9  OSHW-LOGOS  [OSHW-LOGO-S]  108.43,8.6 0 bottom
LOGO10  SFE_LOGO_NAME_FLAME.1_INCH  [SFE_LOGO_NAME_FLAME_.1]  108.2,16.41 0 bottom
LOGO11  OSHW-LOGOS  [OSHW-LOGO-S]  129.25,8.6 0 bottom
LOGO12  SFE_LOGO_NAME_FLAME.1_INCH  [SFE_LOGO_NAME_FLAME_.1]  129.03,16.41 0 bottom
LOGO13  OSHW-LOGOS  [OSHW-LOGO-S]  25.11,29.43 0 bottom
LOGO14  SFE_LOGO_NAME_FLAME.1_INCH  [SFE_LOGO_NAME_FLAME_.1]  24.89,37.24 0 bottom
LOGO15  OSHW-LOGOS  [OSHW-LOGO-S]  45.94,29.43 0 bottom
LOGO16  SFE_LOGO_NAME_FLAME.1_INCH  [SFE_LOGO_NAME_FLAME_.1]  45.72,37.24 0 bottom
LOGO17  OSHW-LOGOS  [OSHW-LOGO-S]  66.77,29.43 0 bottom
LOGO18  SFE_LOGO_NAME_FLAME.1_INCH  [SFE_LOGO_NAME_FLAME_.1]  66.55,37.24 0 bottom
LOGO19  OSHW-LOGOS  [OSHW-LOGO-S]  87.6,29.43 0 bottom
LOGO20  SFE_LOGO_NAME_FLAME.1_INCH  [SFE_LOGO_NAME_FLAME_.1]  87.38,37.24 0 bottom
LOGO21  OSHW-LOGOS  [OSHW-LOGO-S]  108.43,29.43 0 bottom
LOGO22  SFE_LOGO_NAME_FLAME.1_INCH  [SFE_LOGO_NAME_FLAME_.1]  108.2,37.24 0 bottom
LOGO23  OSHW-LOGOS  [OSHW-LOGO-S]  129.25,29.43 0 bottom
LOGO24  SFE_LOGO_NAME_FLAME.1_INCH  [SFE_LOGO_NAME_FLAME_.1]  129.03,37.24 0 bottom
LOGO25  OSHW-LOGOS  [OSHW-LOGO-S]  25.11,50.26 0 bottom
LOGO26  SFE_LOGO_NAME_FLAME.1_INCH  [SFE_LOGO_NAME_FLAME_.1]  24.89,58.07 0 bottom
LOGO27  OSHW-LOGOS  [OSHW-LOGO-S]  45.94,50.26 0 bottom
LOGO28  SFE_LOGO_NAME_FLAME.1_INCH  [SFE_LOGO_NAME_FLAME_.1]  45.72,58.07 0 bottom
LOGO29  OSHW-LOGOS  [OSHW-LOGO-S]  66.77,50.26 0 bottom
LOGO30  SFE_LOGO_NAME_FLAME.1_INCH  [SFE_LOGO_NAME_FLAME_.1]  66.55,58.07 0 bottom
LOGO31  OSHW-LOGOS  [OSHW-LOGO-S]  87.6,50.26 0 bottom
LOGO32  SFE_LOGO_NAME_FLAME.1_INCH  [SFE_LOGO_NAME_FLAME_.1]  87.38,58.07 0 bottom
LOGO33  OSHW-LOGOS  [OSHW-LOGO-S]  108.43,50.26 0 bottom
LOGO34  SFE_LOGO_NAME_FLAME.1_INCH  [SFE_LOGO_NAME_FLAME_.1]  108.2,58.07 0 bottom
LOGO35  OSHW-LOGOS  [OSHW-LOGO-S]  129.25,50.26 0 bottom
LOGO36  SFE_LOGO_NAME_FLAME.1_INCH  [SFE_LOGO_NAME_FLAME_.1]  129.03,58.07 0 bottom
LOGO37  OSHW-LOGOS  [OSHW-LOGO-S]  25.11,71.09 0 bottom
LOGO38  SFE_LOGO_NAME_FLAME.1_INCH  [SFE_LOGO_NAME_FLAME_.1]  24.89,78.9 0 bottom
LOGO39  OSHW-LOGOS  [OSHW-LOGO-S]  45.94,71.09 0 bottom
LOGO40  SFE_LOGO_NAME_FLAME.1_INCH  [SFE_LOGO_NAME_FLAME_.1]  45.72,78.9 0 bottom
LOGO41  OSHW-LOGOS  [OSHW-LOGO-S]  66.77,71.09 0 bottom
LOGO42  SFE_LOGO_NAME_FLAME.1_INCH  [SFE_LOGO_NAME_FLAME_.1]  66.55,78.9 0 bottom
LOGO43  OSHW-LOGOS  [OSHW-LOGO-S]  87.6,71.09 0 bottom
LOGO44  SFE_LOGO_NAME_FLAME.1_INCH  [SFE_LOGO_NAME_FLAME_.1]  87.38,78.9 0 bottom
LOGO45  OSHW-LOGOS  [OSHW-LOGO-S]  108.43,71.09 0 bottom
LOGO46  SFE_LOGO_NAME_FLAME.1_INCH  [SFE_LOGO_NAME_FLAME_.1]  108.2,78.9 0 bottom
LOGO47  OSHW-LOGOS  [OSHW-LOGO-S]  129.25,71.09 0 bottom
LOGO48  SFE_LOGO_NAME_FLAME.1_INCH  [SFE_LOGO_NAME_FLAME_.1]  129.03,78.9 0 bottom
LOGO49  OSHW-LOGOS  [OSHW-LOGO-S]  25.11,91.92 0 bottom
LOGO50  SFE_LOGO_NAME_FLAME.1_INCH  [SFE_LOGO_NAME_FLAME_.1]  24.89,99.73 0 bottom
LOGO51  OSHW-LOGOS  [OSHW-LOGO-S]  45.94,91.92 0 bottom
LOGO52  SFE_LOGO_NAME_FLAME.1_INCH  [SFE_LOGO_NAME_FLAME_.1]  45.72,99.73 0 bottom
LOGO53  OSHW-LOGOS  [OSHW-LOGO-S]  66.77,91.92 0 bottom
LOGO54  SFE_LOGO_NAME_FLAME.1_INCH  [SFE_LOGO_NAME_FLAME_.1]  66.55,99.73 0 bottom
LOGO55  OSHW-LOGOS  [OSHW-LOGO-S]  87.6,91.92 0 bottom
LOGO56  SFE_LOGO_NAME_FLAME.1_INCH  [SFE_LOGO_NAME_FLAME_.1]  87.38,99.73 0 bottom
LOGO57  OSHW-LOGOS  [OSHW-LOGO-S]  108.43,91.92 0 bottom
LOGO58  SFE_LOGO_NAME_FLAME.1_INCH  [SFE_LOGO_NAME_FLAME_.1]  108.2,99.73 0 bottom
LOGO59  OSHW-LOGOS  [OSHW-LOGO-S]  129.25,91.92 0 bottom
LOGO60  SFE_LOGO_NAME_FLAME.1_INCH  [SFE_LOGO_NAME_FLAME_.1]  129.03,99.73 0 bottom
LOGO61  OSHW-LOGOS  [OSHW-LOGO-S]  25.11,112.74 0 bottom
LOGO62  SFE_LOGO_NAME_FLAME.1_INCH  [SFE_LOGO_NAME_FLAME_.1]  24.89,120.55 0 bottom
LOGO63  OSHW-LOGOS  [OSHW-LOGO-S]  45.94,112.74 0 bottom
LOGO64  SFE_LOGO_NAME_FLAME.1_INCH  [SFE_LOGO_NAME_FLAME_.1]  45.72,120.55 0 bottom
LOGO65  OSHW-LOGOS  [OSHW-LOGO-S]  66.77,112.74 0 bottom
LOGO66  SFE_LOGO_NAME_FLAME.1_INCH  [SFE_LOGO_NAME_FLAME_.1]  66.55,120.55 0 bottom
LOGO67  OSHW-LOGOS  [OSHW-LOGO-S]  87.6,112.74 0 bottom
LOGO68  SFE_LOGO_NAME_FLAME.1_INCH  [SFE_LOGO_NAME_FLAME_.1]  87.38,120.55 0 bottom
LOGO69  OSHW-LOGOS  [OSHW-LOGO-S]  108.43,112.74 0 bottom
LOGO70  SFE_LOGO_NAME_FLAME.1_INCH  [SFE_LOGO_NAME_FLAME_.1]  108.2,120.55 0 bottom
LOGO71  OSHW-LOGOS  [OSHW-LOGO-S]  129.25,112.74 0 bottom
LOGO72  SFE_LOGO_NAME_FLAME.1_INCH  [SFE_LOGO_NAME_FLAME_.1]  129.03,120.55 0 bottom
LOGO73  OSHW-LOGOS  [OSHW-LOGO-S]  25.11,133.57 0 bottom
LOGO74  SFE_LOGO_NAME_FLAME.1_INCH  [SFE_LOGO_NAME_FLAME_.1]  24.89,141.38 0 bottom
LOGO75  OSHW-LOGOS  [OSHW-LOGO-S]  45.94,133.57 0 bottom
LOGO76  SFE_LOGO_NAME_FLAME.1_INCH  [SFE_LOGO_NAME_FLAME_.1]  45.72,141.38 0 bottom
LOGO77  OSHW-LOGOS  [OSHW-LOGO-S]  66.77,133.57 0 bottom
LOGO78  SFE_LOGO_NAME_FLAME.1_INCH  [SFE_LOGO_NAME_FLAME_.1]  66.55,141.38 0 bottom
LOGO79  OSHW-LOGOS  [OSHW-LOGO-S]  87.6,133.57 0 bottom
LOGO80  SFE_LOGO_NAME_FLAME.1_INCH  [SFE_LOGO_NAME_FLAME_.1]  87.38,141.38 0 bottom
LOGO81  OSHW-LOGOS  [OSHW-LOGO-S]  108.43,133.57 0 bottom
LOGO82  SFE_LOGO_NAME_FLAME.1_INCH  [SFE_LOGO_NAME_FLAME_.1]  108.2,141.38 0 bottom
LOGO83  OSHW-LOGOS  [OSHW-LOGO-S]  129.25,133.57 0 bottom
LOGO84  SFE_LOGO_NAME_FLAME.1_INCH  [SFE_LOGO_NAME_FLAME_.1]  129.03,141.38 0 bottom
LOGO85  OSHW-LOGOS  [OSHW-LOGO-S]  25.11,154.4 0 bottom
LOGO86  SFE_LOGO_NAME_FLAME.1_INCH  [SFE_LOGO_NAME_FLAME_.1]  24.89,162.21 0 bottom
LOGO87  OSHW-LOGOS  [OSHW-LOGO-S]  45.94,154.4 0 bottom
LOGO88  SFE_LOGO_NAME_FLAME.1_INCH  [SFE_LOGO_NAME_FLAME_.1]  45.72,162.21 0 bottom
LOGO89  OSHW-LOGOS  [OSHW-LOGO-S]  66.77,154.4 0 bottom
LOGO90  SFE_LOGO_NAME_FLAME.1_INCH  [SFE_LOGO_NAME_FLAME_.1]  66.55,162.21 0 bottom
LOGO91  OSHW-LOGOS  [OSHW-LOGO-S]  87.6,154.4 0 bottom
LOGO92  SFE_LOGO_NAME_FLAME.1_INCH  [SFE_LOGO_NAME_FLAME_.1]  87.38,162.21 0 bottom
LOGO93  OSHW-LOGOS  [OSHW-LOGO-S]  108.43,154.4 0 bottom
LOGO94  SFE_LOGO_NAME_FLAME.1_INCH  [SFE_LOGO_NAME_FLAME_.1]  108.2,162.21 0 bottom
LOGO95  OSHW-LOGOS  [OSHW-LOGO-S]  129.25,154.4 0 bottom
LOGO96  SFE_LOGO_NAME_FLAME.1_INCH  [SFE_LOGO_NAME_FLAME_.1]  129.03,162.21 0 bottom
LOGO97  OSHW-LOGOS  [OSHW-LOGO-S]  25.11,175.23 0 bottom
LOGO98  SFE_LOGO_NAME_FLAME.1_INCH  [SFE_LOGO_NAME_FLAME_.1]  24.89,183.04 0 bottom
LOGO99  OSHW-LOGOS  [OSHW-LOGO-S]  45.94,175.23 0 bottom
LOGO100  SFE_LOGO_NAME_FLAME.1_INCH  [SFE_LOGO_NAME_FLAME_.1]  45.72,183.04 0 bottom
LOGO101  OSHW-LOGOS  [OSHW-LOGO-S]  66.77,175.23 0 bottom
LOGO102  SFE_LOGO_NAME_FLAME.1_INCH  [SFE_LOGO_NAME_FLAME_.1]  66.55,183.04 0 bottom
LOGO103  OSHW-LOGOS  [OSHW-LOGO-S]  87.6,175.23 0 bottom
LOGO104  SFE_LOGO_NAME_FLAME.1_INCH  [SFE_LOGO_NAME_FLAME_.1]  87.38,183.04 0 bottom
LOGO105  OSHW-LOGOS  [OSHW-LOGO-S]  108.43,175.23 0 bottom
LOGO106  SFE_LOGO_NAME_FLAME.1_INCH  [SFE_LOGO_NAME_FLAME_.1]  108.2,183.04 0 bottom
LOGO107  OSHW-LOGOS  [OSHW-LOGO-S]  129.25,175.23 0 bottom
LOGO108  SFE_LOGO_NAME_FLAME.1_INCH  [SFE_LOGO_NAME_FLAME_.1]  129.03,183.04 0 bottom
LOGO109  OSHW-LOGOS  [OSHW-LOGO-S]  25.11,196.06 0 bottom
LOGO110  SFE_LOGO_NAME_FLAME.1_INCH  [SFE_LOGO_NAME_FLAME_.1]  24.89,203.87 0 bottom
LOGO111  OSHW-LOGOS  [OSHW-LOGO-S]  45.94,196.06 0 bottom
LOGO112  SFE_LOGO_NAME_FLAME.1_INCH  [SFE_LOGO_NAME_FLAME_.1]  45.72,203.87 0 bottom
LOGO113  OSHW-LOGOS  [OSHW-LOGO-S]  66.77,196.06 0 bottom
LOGO114  SFE_LOGO_NAME_FLAME.1_INCH  [SFE_LOGO_NAME_FLAME_.1]  66.55,203.87 0 bottom
LOGO115  OSHW-LOGOS  [OSHW-LOGO-S]  87.6,196.06 0 bottom
LOGO116  SFE_LOGO_NAME_FLAME.1_INCH  [SFE_LOGO_NAME_FLAME_.1]  87.38,203.87 0 bottom
LOGO117  OSHW-LOGOS  [OSHW-LOGO-S]  108.43,196.06 0 bottom
LOGO118  SFE_LOGO_NAME_FLAME.1_INCH  [SFE_LOGO_NAME_FLAME_.1]  108.2,203.87 0 bottom
LOGO119  OSHW-LOGOS  [OSHW-LOGO-S]  129.25,196.06 0 bottom
LOGO120  SFE_LOGO_NAME_FLAME.1_INCH  [SFE_LOGO_NAME_FLAME_.1]  129.03,203.87 0 bottom
R1  2.2k  [0603-RES]  20.67,13.53 270 top
R2  2.2k  [0603-RES]  14.8,13.53 270 top
R3  2.2k  [0603-RES]  41.5,13.53 270 top
R4  2.2k  [0603-RES]  35.62,13.53 270 top
R5  2.2k  [0603-RES]  62.33,13.53 270 top
R6  2.2k  [0603-RES]  56.45,13.53 270 top
R7  2.2k  [0603-RES]  83.15,13.53 270 top
R8  2.2k  [0603-RES]  77.28,13.53 270 top
R9  2.2k  [0603-RES]  103.98,13.53 270 top
R10  2.2k  [0603-RES]  98.11,13.53 270 top
R11  2.2k  [0603-RES]  124.81,13.53 270 top
R12  2.2k  [0603-RES]  118.94,13.53 270 top
R13  2.2k  [0603-RES]  20.67,34.35 270 top
R14  2.2k  [0603-RES]  14.8,34.35 270 top
R15  2.2k  [0603-RES]  41.5,34.35 270 top
R16  2.2k  [0603-RES]  35.62,34.35 270 top
R17  2.2k  [0603-RES]  62.33,34.35 270 top
R18  2.2k  [0603-RES]  56.45,34.35 270 top
R19  2.2k  [0603-RES]  83.15,34.35 270 top
R20  2.2k  [0603-RES]  77.28,34.35 270 top
R21  2.2k  [0603-RES]  103.98,34.35 270 top
R22  2.2k  [0603-RES]  98.11,34.35 270 top
R23  2.2k  [0603-RES]  124.81,34.35 270 top
R24  2.2k  [0603-RES]  118.94,34.35 270 top
R25  2.2k  [0603-RES]  20.67,55.18 270 top
R26  2.2k  [0603-RES]  14.8,55.18 270 top
R27  2.2k  [0603-RES]  41.5,55.18 270 top
R28  2.2k  [0603-RES]  35.62,55.18 270 top
R29  2.2k  [0603-RES]  62.33,55.18 270 top
R30  2.2k  [0603-RES]  56.45,55.18 270 top
R31  2.2k  [0603-RES]  83.15,55.18 270 top
R32  2.2k  [0603-RES]  77.28,55.18 270 top
R33  2.2k  [0603-RES]  103.98,55.18 270 top
R34  2.2k  [0603-RES]  98.11,55.18 270 top
R35  2.2k  [0603-RES]  124.81,55.18 270 top
R36  2.2k  [0603-RES]  118.94,55.18 270 top
R37  2.2k  [0603-RES]  20.67,76.01 270 top
R38  2.2k  [0603-RES]  14.8,76.01 270 top
R39  2.2k  [0603-RES]  41.5,76.01 270 top
R40  2.2k  [0603-RES]  35.62,76.01 270 top
R41  2.2k  [0603-RES]  62.33,76.01 270 top
R42  2.2k  [0603-RES]  56.45,76.01 270 top
R43  2.2k  [0603-RES]  83.15,76.01 270 top
R44  2.2k  [0603-RES]  77.28,76.01 270 top
R45  2.2k  [0603-RES]  103.98,76.01 270 top
R46  2.2k  [0603-RES]  98.11,76.01 270 top
R47  2.2k  [0603-RES]  124.81,76.01 270 top
R48  2.2k  [0603-RES]  118.94,76.01 270 top
R49  2.2k  [0603-RES]  20.67,96.84 270 top
R50  2.2k  [0603-RES]  14.8,96.84 270 top
R51  2.2k  [0603-RES]  41.5,96.84 270 top
R52  2.2k  [0603-RES]  35.62,96.84 270 top
R53  2.2k  [0603-RES]  62.33,96.84 270 top
R54  2.2k  [0603-RES]  56.45,96.84 270 top
R55  2.2k  [0603-RES]  83.15,96.84 270 top
R56  2.2k  [0603-RES]  77.28,96.84 270 top
R57  2.2k  [0603-RES]  103.98,96.84 270 top
R58  2.2k  [0603-RES]  98.11,96.84 270 top
R59  2.2k  [0603-RES]  124.81,96.84 270 top
R60  2.2k  [0603-RES]  118.94,96.84 270 top
R61  2.2k  [0603-RES]  20.67,117.67 270 top
R62  2.2k  [0603-RES]  14.8,117.67 270 top
R63  2.2k  [0603-RES]  41.5,117.67 270 top
R64  2.2k  [0603-RES]  35.62,117.67 270 top
R65  2.2k  [0603-RES]  62.33,117.67 270 top
R66  2.2k  [0603-RES]  56.45,117.67 270 top
R67  2.2k  [0603-RES]  83.15,117.67 270 top
R68  2.2k  [0603-RES]  77.28,117.67 270 top
R69  2.2k  [0603-RES]  103.98,117.67 270 top
R70  2.2k  [0603-RES]  98.11,117.67 270 top
R71  2.2k  [0603-RES]  124.81,117.67 270 top
R72  2.2k  [0603-RES]  118.94,117.67 270 top
R73  2.2k  [0603-RES]  20.67,138.49 270 top
R74  2.2k  [0603-RES]  14.8,138.49 270 top
R75  2.2k  [0603-RES]  41.5,138.49 270 top
R76  2.2k  [0603-RES]  35.62,138.49 270 top
R77  2.2k  [0603-RES]  62.33,138.49 270 top
R78  2.2k  [0603-RES]  56.45,138.49 270 top
R79  2.2k  [0603-RES]  83.15,138.49 270 top
R80  2.2k  [0603-RES]  77.28,138.49 270 top
R81  2.2k  [0603-RES]  103.98,138.49 270 top
R82  2.2k  [0603-RES]  98.11,138.49 270 top
R83  2.2k  [0603-RES]  124.81,138.49 270 top
R84  2.2k  [0603-RES]  118.94,138.49 270 top
R85  2.2k  [0603-RES]  20.67,159.32 270 top
R86  2.2k  [0603-RES]  14.8,159.32 270 top
R87  2.2k  [0603-RES]  41.5,159.32 270 top
R88  2.2k  [0603-RES]  35.62,159.32 270 top
R89  2.2k  [0603-RES]  62.33,159.32 270 top
R90  2.2k  [0603-RES]  56.45,159.32 270 top
R91  2.2k  [0603-RES]  83.15,159.32 270 top
R92  2.2k  [0603-RES]  77.28,159.32 270 top
R93  2.2k  [0603-RES]  103.98,159.32 270 top
R94  2.2k  [0603-RES]  98.11,159.32 270 top
R95  2.2k  [0603-RES]  124.81,159.32 270 top
R96  2.2k  [0603-RES]  118.94,159.32 270 top
R97  2.2k  [0603-RES]  20.67,180.15 270 top
R98  2.2k  [0603-RES]  14.8,180.15 270 top
R99  2.2k  [0603-RES]  41.5,180.15 270 top
R100  2.2k  [0603-RES]  35.62,180.15 270 top
R101  2.2k  [0603-RES]  62.33,180.15 270 top
R102  2.2k  [0603-RES]  56.45,180.15 270 top
R103  2.2k  [0603-RES]  83.15,180.15 270 top
R104  2.2k  [0603-RES]  77.28,180.15 270 top
R105  2.2k  [0603-RES]  103.98,180.15 270 top
R106  2.2k  [0603-RES]  98.11,180.15 270 top
R107  2.2k  [0603-RES]  124.81,180.15 270 top
R108  2.2k  [0603-RES]  118.94,180.15 270 top
R109  2.2k  [0603-RES]  20.67,200.98 270 top
R110  2.2k  [0603-RES]  14.8,200.98 270 top
R111  2.2k  [0603-RES]  41.5,200.98 270 top
R112  2.2k  [0603-RES]  35.62,200.98 270 top
R113  2.2k  [0603-RES]  62.33,200.98 270 top
R114  2.2k  [0603-RES]  56.45,200.98 270 top
R115  2.2k  [0603-RES]  83.15,200.98 270 top
R116  2.2k  [0603-RES]  77.28,200.98 270 top
R117  2.2k  [0603-RES]  103.98,200.98 270 top
R118  2.2k  [0603-RES]  98.11,200.98 270 top
R119  2.2k  [0603-RES]  124.81,200.98 270 top
R120  2.2k  [0603-RES]  118.94,200.98 270 top
STANDOFF1  STAND-OFF  [STAND-OFF]  24.64,24.64 0 top
STANDOFF2  STAND-OFF  [STAND-OFF]  30.23,24.64 0 top
STANDOFF3  STAND-OFF  [STAND-OFF]  45.47,24.64 0 top
STANDOFF4  STAND-OFF  [STAND-OFF]  9.4,24.64 0 top
STANDOFF5  STAND-OFF  [STAND-OFF]  51.05,24.64 0 top
STANDOFF6  STAND-OFF  [STAND-OFF]  66.29,24.64 0 top
STANDOFF7  STAND-OFF  [STAND-OFF]  71.88,24.64 0 top
STANDOFF8  STAND-OFF  [STAND-OFF]  87.12,24.64 0 top
STANDOFF9  STAND-OFF  [STAND-OFF]  92.71,24.64 0 top
STANDOFF10  STAND-OFF  [STAND-OFF]  107.95,24.64 0 top
STANDOFF11  STAND-OFF  [STAND-OFF]  113.54,24.64 0 top
STANDOFF12  STAND-OFF  [STAND-OFF]  128.78,24.64 0 top
STANDOFF13  STAND-OFF  [STAND-OFF]  9.4,45.47 0 top
STANDOFF14  STAND-OFF  [STAND-OFF]  24.64,45.47 0 top
STANDOFF15  STAND-OFF  [STAND-OFF]  30.23,45.47 0 top
STANDOFF16  STAND-OFF  [STAND-OFF]  45.47,45.47 0 top
STANDOFF17  STAND-OFF  [STAND-OFF]  51.05,45.47 0 top
STANDOFF18  STAND-OFF  [STAND-OFF]  66.29,45.47 0 top
STANDOFF19  STAND-OFF  [STAND-OFF]  71.88,45.47 0 top
STANDOFF20  STAND-OFF  [STAND-OFF]  87.12,45.47 0 top
STANDOFF21  STAND-OFF  [STAND-OFF]  92.71,45.47 0 top
STANDOFF22  STAND-OFF  [STAND-OFF]  107.95,45.47 0 top
STANDOFF23  STAND-OFF  [STAND-OFF]  113.54,45.47 0 top
STANDOFF24  STAND-OFF  [STAND-OFF]  128.78,45.47 0 top
STANDOFF25  STAND-OFF  [STAND-OFF]  9.4,66.29 0 top
STANDOFF26  STAND-OFF  [STAND-OFF]  24.64,66.29 0 top
STANDOFF27  STAND-OFF  [STAND-OFF]  30.23,66.29 0 top
STANDOFF28  STAND-OFF  [STAND-OFF]  45.47,66.29 0 top
STANDOFF29  STAND-OFF  [STAND-OFF]  51.05,66.29 0 top
STANDOFF30  STAND-OFF  [STAND-OFF]  66.29,66.29 0 top
STANDOFF31  STAND-OFF  [STAND-OFF]  71.88,66.29 0 top
STANDOFF32  STAND-OFF  [STAND-OFF]  87.12,66.29 0 top
STANDOFF33  STAND-OFF  [STAND-OFF]  92.71,66.29 0 top
STANDOFF34  STAND-OFF  [STAND-OFF]  107.95,66.29 0 top
STANDOFF35  STAND-OFF  [STAND-OFF]  113.54,66.29 0 top
STANDOFF36  STAND-OFF  [STAND-OFF]  128.78,66.29 0 top
STANDOFF37  STAND-OFF  [STAND-OFF]  9.4,87.12 0 top
STANDOFF38  STAND-OFF  [STAND-OFF]  24.64,87.12 0 top
STANDOFF39  STAND-OFF  [STAND-OFF]  30.23,87.12 0 top
STANDOFF40  STAND-OFF  [STAND-OFF]  45.47,87.12 0 top
STANDOFF41  STAND-OFF  [STAND-OFF]  51.05,87.12 0 top
STANDOFF42  STAND-OFF  [STAND-OFF]  66.29,87.12 0 top
STANDOFF43  STAND-OFF  [STAND-OFF]  71.88,87.12 0 top
STANDOFF44  STAND-OFF  [STAND-OFF]  87.12,87.12 0 top
STANDOFF45  STAND-OFF  [STAND-OFF]  92.71,87.12 0 top
STANDOFF46  STAND-OFF  [STAND-OFF]  107.95,87.12 0 top
STANDOFF47  STAND-OFF  [STAND-OFF]  113.54,87.12 0 top
STANDOFF48  STAND-OFF  [STAND-OFF]  128.78,87.12 0 top
STANDOFF49  STAND-OFF  [STAND-OFF]  9.4,107.95 0 top
STANDOFF50  STAND-OFF  [STAND-OFF]  24.64,107.95 0 top
STANDOFF51  STAND-OFF  [STAND-OFF]  30.23,107.95 0 top
STANDOFF52  STAND-OFF  [STAND-OFF]  45.47,107.95 0 top
STANDOFF53  STAND-OFF  [STAND-OFF]  51.05,107.95 0 top
STANDOFF54  STAND-OFF  [STAND-OFF]  66.29,107.95 0 top
STANDOFF55  STAND-OFF  [STAND-OFF]  71.88,107.95 0 top
STANDOFF56  STAND-OFF  [STAND-OFF]  87.12,107.95 0 top
STANDOFF57  STAND-OFF  [STAND-OFF]  92.71,107.95 0 top
STANDOFF58  STAND-OFF  [STAND-OFF]  107.95,107.95 0 top
STANDOFF59  STAND-OFF  [STAND-OFF]  113.54,107.95 0 top
STANDOFF60  STAND-OFF  [STAND-OFF]  128.78,107.95 0 top
STANDOFF61  STAND-OFF  [STAND-OFF]  9.4,128.78 0 top
STANDOFF62  STAND-OFF  [STAND-OFF]  24.64,128.78 0 top
STANDOFF63  STAND-OFF  [STAND-OFF]  30.23,128.78 0 top
STANDOFF64  STAND-OFF  [STAND-OFF]  45.47,128.78 0 top
STANDOFF65  STAND-OFF  [STAND-OFF]  51.05,128.78 0 top
STANDOFF66  STAND-OFF  [STAND-OFF]  66.29,128.78 0 top
STANDOFF67  STAND-OFF  [STAND-OFF]  71.88,128.78 0 top
STANDOFF68  STAND-OFF  [STAND-OFF]  87.12,128.78 0 top
STANDOFF69  STAND-OFF  [STAND-OFF]  92.71,128.78 0 top
STANDOFF70  STAND-OFF  [STAND-OFF]  107.95,128.78 0 top
STANDOFF71  STAND-OFF  [STAND-OFF]  113.54,128.78 0 top
STANDOFF72  STAND-OFF  [STAND-OFF]  128.78,128.78 0 top
STANDOFF73  STAND-OFF  [STAND-OFF]  9.4,149.61 0 top
STANDOFF74  STAND-OFF  [STAND-OFF]  24.64,149.61 0 top
STANDOFF75  STAND-OFF  [STAND-OFF]  30.23,149.61 0 top
STANDOFF76  STAND-OFF  [STAND-OFF]  45.47,149.61 0 top
STANDOFF77  STAND-OFF  [STAND-OFF]  51.05,149.61 0 top
STANDOFF78  STAND-OFF  [STAND-OFF]  66.29,149.61 0 top
STANDOFF79  STAND-OFF  [STAND-OFF]  71.88,149.61 0 top
STANDOFF80  STAND-OFF  [STAND-OFF]  87.12,149.61 0 top
STANDOFF81  STAND-OFF  [STAND-OFF]  92.71,149.61 0 top
STANDOFF82  STAND-OFF  [STAND-OFF]  107.95,149.61 0 top
STANDOFF83  STAND-OFF  [STAND-OFF]  113.54,149.61 0 top
STANDOFF84  STAND-OFF  [STAND-OFF]  128.78,149.61 0 top
STANDOFF85  STAND-OFF  [STAND-OFF]  9.4,170.43 0 top
STANDOFF86  STAND-OFF  [STAND-OFF]  24.64,170.43 0 top
STANDOFF87  STAND-OFF  [STAND-OFF]  30.23,170.43 0 top
STANDOFF88  STAND-OFF  [STAND-OFF]  45.47,170.43 0 top
STANDOFF89  STAND-OFF  [STAND-OFF]  51.05,170.43 0 top
STANDOFF90  STAND-OFF  [STAND-OFF]  66.29,170.43 0 top
STANDOFF91  STAND-OFF  [STAND-OFF]  71.88,170.43 0 top
STANDOFF92  STAND-OFF  [STAND-OFF]  87.12,170.43 0 top
STANDOFF93  STAND-OFF  [STAND-OFF]  92.71,170.43 0 top
STANDOFF94  STAND-OFF  [STAND-OFF]  107.95,170.43 0 top
STANDOFF95  STAND-OFF  [STAND-OFF]  113.54,170.43 0 top
STANDOFF96  STAND-OFF  [STAND-OFF]  128.78,170.43 0 top
STANDOFF97  STAND-OFF  [STAND-OFF]  9.4,191.26 0 top
STANDOFF98  STAND-OFF  [STAND-OFF]  24.64,191.26 0 top
STANDOFF99  STAND-OFF  [STAND-OFF]  30.23,191.26 0 top
STANDOFF100  STAND-OFF  [STAND-OFF]  45.47,191.26 0 top
STANDOFF101  STAND-OFF  [STAND-OFF]  51.05,191.26 0 top
STANDOFF102  STAND-OFF  [STAND-OFF]  66.29,191.26 0 top
STANDOFF103  STAND-OFF  [STAND-OFF]  71.88,191.26 0 top
STANDOFF104  STAND-OFF  [STAND-OFF]  87.12,191.26 0 top
STANDOFF105  STAND-OFF  [STAND-OFF]  92.71,191.26 0 top
STANDOFF106  STAND-OFF  [STAND-OFF]  107.95,191.26 0 top
STANDOFF107  STAND-OFF  [STAND-OFF]  113.54,191.26 0 top
STANDOFF108  STAND-OFF  [STAND-OFF]  128.78,191.26 0 top
STANDOFF109  STAND-OFF  [STAND-OFF]  9.4,212.09 0 top
STANDOFF110  STAND-OFF  [STAND-OFF]  24.64,212.09 0 top
STANDOFF111  STAND-OFF  [STAND-OFF]  30.23,212.09 0 top
STANDOFF112  STAND-OFF  [STAND-OFF]  45.47,212.09 0 top
STANDOFF113  STAND-OFF  [STAND-OFF]  51.05,212.09 0 top
STANDOFF114  STAND-OFF  [STAND-OFF]  66.29,212.09 0 top
STANDOFF115  STAND-OFF  [STAND-OFF]  71.88,212.09 0 top
STANDOFF116  STAND-OFF  [STAND-OFF]  87.12,212.09 0 top
STANDOFF117  STAND-OFF  [STAND-OFF]  92.71,212.09 0 top
STANDOFF118  STAND-OFF  [STAND-OFF]  107.95,212.09 0 top
STANDOFF119  STAND-OFF  [STAND-OFF]  113.54,212.09 0 top
STANDOFF120  STAND-OFF  [STAND-OFF]  128.78,212.09 0 top
U1  DRV2605L  [VSSOP-10]  17.49,18.61 0 top
U2  DRV2605L  [VSSOP-10]  38.32,18.61 0 top
U3  DRV2605L  [VSSOP-10]  59.15,18.61 0 top
U4  DRV2605L  [VSSOP-10]  79.98,18.61 0 top
U5  DRV2605L  [VSSOP-10]  100.81,18.61 0 top
U6  DRV2605L  [VSSOP-10]  121.63,18.61 0 top
U7  DRV2605L  [VSSOP-10]  17.49,39.43 0 top
U8  DRV2605L  [VSSOP-10]  38.32,39.43 0 top
U9  DRV2605L  [VSSOP-10]  59.15,39.43 0 top
U10  DRV2605L  [VSSOP-10]  79.98,39.43 0 top
U11  DRV2605L  [VSSOP-10]  100.81,39.43 0 top
U12  DRV2605L  [VSSOP-10]  121.63,39.43 0 top
U13  DRV2605L  [VSSOP-10]  17.49,60.26 0 top
U14  DRV2605L  [VSSOP-10]  38.32,60.26 0 top
U15  DRV2605L  [VSSOP-10]  59.15,60.26 0 top
U16  DRV2605L  [VSSOP-10]  79.98,60.26 0 top
U17  DRV2605L  [VSSOP-10]  100.81,60.26 0 top
U18  DRV2605L  [VSSOP-10]  121.63,60.26 0 top
U19  DRV2605L  [VSSOP-10]  17.49,81.09 0 top
U20  DRV2605L  [VSSOP-10]  38.32,81.09 0 top
U21  DRV2605L  [VSSOP-10]  59.15,81.09 0 top
U22  DRV2605L  [VSSOP-10]  79.98,81.09 0 top
U23  DRV2605L  [VSSOP-10]  100.81,81.09 0 top
U24  DRV2605L  [VSSOP-10]  121.63,81.09 0 top
U25  DRV2605L  [VSSOP-10]  17.49,101.92 0 top
U26  DRV2605L  [VSSOP-10]  38.32,101.92 0 top
U27  DRV2605L  [VSSOP-10]  59.15,101.92 0 top
U28  DRV2605L  [VSSOP-10]  79.98,101.92 0 top
U29  DRV2605L  [VSSOP-10]  100.81,101.92 0 top
U30  DRV2605L  [VSSOP-10]  121.63,101.92 0 top
U31  DRV2605L  [VSSOP-10]  17.49,122.75 0 top
U32  DRV2605L  [VSSOP-10]  38.32,122.75 0 top
U33  DRV2605L  [VSSOP-10]  59.15,122.75 0 top
U34  DRV2605L  [VSSOP-10]  79.98,122.75 0 top
U35  DRV2605L  [VSSOP-10]  100.81,122.75 0 top
U36  DRV2605L  [VSSOP-10]  121.63,122.75 0 top
U37  DRV2605L  [VSSOP-10]  17.49,143.57 0 top
U38  DRV2605L  [VSSOP-10]  38.32,143.57 0 top
U39  DRV2605L  [VSSOP-10]  59.15,143.57 0 top
U40  DRV2605L  [VSSOP-10]  79.98,143.57 0 top
U41  DRV2605L  [VSSOP-10]  100.81,143.57 0 top
U42  DRV2605L  [VSSOP-10]  121.63,143.57 0 top
U43  DRV2605L  [VSSOP-10]  17.49,164.4 0 top
U44  DRV2605L  [VSSOP-10]  38.32,164.4 0 top
U45  DRV2605L  [VSSOP-10]  59.15,164.4 0 top
U46  DRV2605L  [VSSOP-10]  79.98,164.4 0 top
U47  DRV2605L  [VSSOP-10]  100.81,164.4 0 top
U48  DRV2605L  [VSSOP-10]  121.63,164.4 0 top
U49  DRV2605L  [VSSOP-10]  17.49,185.23 0 top
U50  DRV2605L  [VSSOP-10]  38.32,185.23 0 top
U51  DRV2605L  [VSSOP-10]  59.15,185.23 0 top
U52  DRV2605L  [VSSOP-10]  79.98,185.23 0 top
U53  DRV2605L  [VSSOP-10]  100.81,185.23 0 top
U54  DRV2605L  [VSSOP-10]  121.63,185.23 0 top
U55  DRV2605L  [VSSOP-10]  17.49,206.06 0 top
U56  DRV2605L  [VSSOP-10]  38.32,206.06 0 top
U57  DRV2605L  [VSSOP-10]  59.15,206.06 0 top
U58  DRV2605L  [VSSOP-10]  79.98,206.06 0 top
U59  DRV2605L  [VSSOP-10]  100.81,206.06 0 top
U60  DRV2605L  [VSSOP-10]  121.63,206.06 0 top

## Library data of the parts
C1-C120 = SparkFun-Capacitors; PROD_ID: CAP-12417
E$1 = SparkFun-Retired
E$5 E$6 FID1-FID120 LOGO1-LOGO120 = SparkFun-Aesthetics
I2C I2C1-I2C59 = SparkFun-Passives
JP1 JP4 JP6 JP8 JP10 JP12 JP14 JP16 JP18 JP20 JP22 JP24 JP26 JP28 JP30 JP32 JP34 JP36 JP38 JP40 JP42 JP44 JP46 JP48 JP50 JP52 JP54 JP56 JP58 JP60 JP62 JP64 JP66 JP68 JP70 JP72 JP74 JP76 JP78 JP80 JP82 JP84 JP86 JP88 JP90 JP92 JP94 JP96 JP98 JP100 JP102 JP104 JP106 JP108 JP110 JP112 JP114 JP116 JP118 JP120 = SparkFun-Connectors; PROD_ID: CONN-08437
JP2 JP3 JP5 JP7 JP9 JP11 JP13 JP15 JP17 JP19 JP21 JP23 JP25 JP27 JP29 JP31 JP33 JP35 JP37 JP39 JP41 JP43 JP45 JP47 JP49 JP51 JP53 JP55 JP57 JP59 JP61 JP63 JP65 JP67 JP69 JP71 JP73 JP75 JP77 JP79 JP81 JP83 JP85 JP87 JP89 JP91 JP93 JP95 JP97 JP99 JP101 JP103 JP105 JP107 JP109 JP111 JP113 JP115 JP117 JP119 = SparkFun-Connectors
R1-R120 = SparkFun-Resistors; PROD_ID: RES-08272
STANDOFF1-STANDOFF120 = SparkFun-Electromechanical
U1-U60 = SparkFun-PowerIC; PROD_ID: IC-13504